# Altium PCB GPIOmodule.PcbDoc
Units mm, origin at the board's own origin, x right, y up, seen from the top; angles counter-clockwise.
Board outline 30.01 x 20.01 mm, 2 copper layers (Top Layer, Bottom Layer), stack 1.58 mm thick; 2 components, 3 nets, 13 pads, 5 vias.
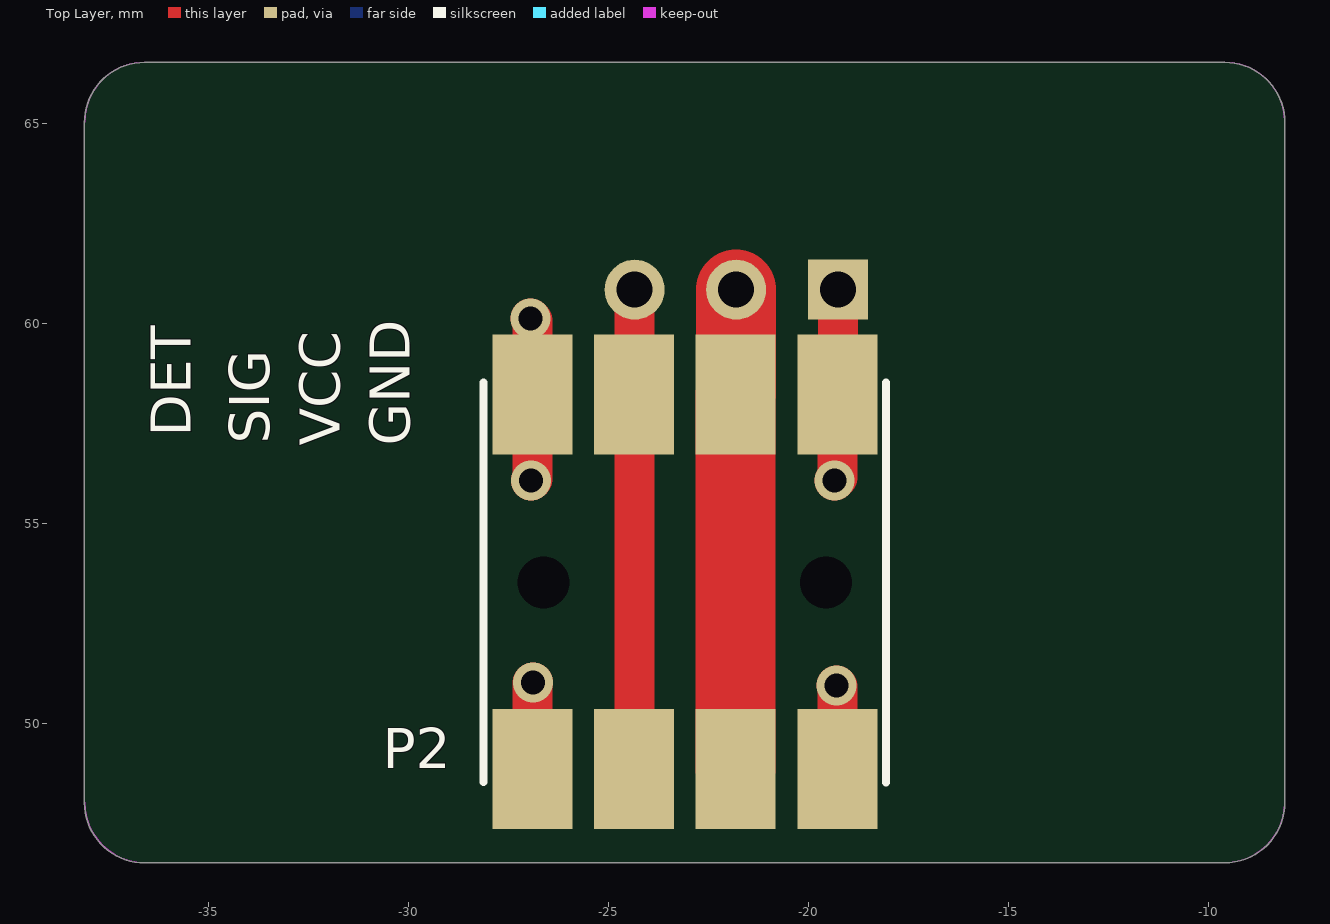
[diagram p0: Top Layer view]
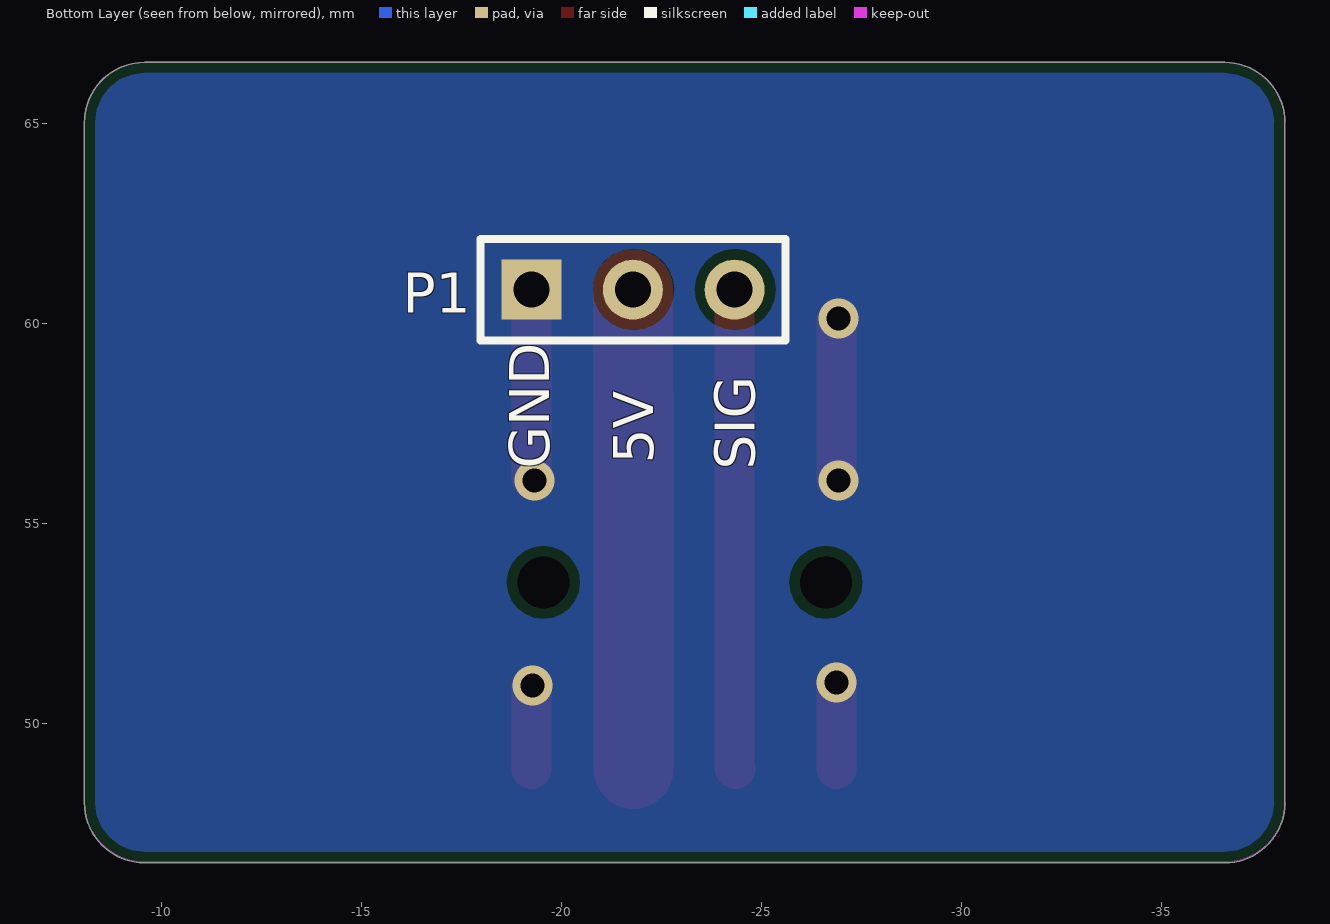
[diagram p1: Bottom Layer view, seen from below]

## Layer stack, top to bottom
Top Solder: solder mask 0.0102, Solder Resist, Dk 3.5
Top Layer: signal copper 0.0356
Dielectric 1: dielectric 1.5086, FR-4, Dk 4.8
Bottom Layer: signal copper 0.0356
Bottom Solder: solder mask 0.0102, Solder Resist, Dk 3.5

## Board outline
-36.586,46.515 cw(c-36.586,48.022) -38.092,48.022 -38.092,65.022 cw(c-36.586,65.022) -36.586,66.529 cw(c-36.586,66.522) -36.586,66.529 cw(c-36.586,66.522) -36.586,66.529 -9.586,66.529 ccw(c-9.586,66.522) -9.586,66.529 ccw(c-9.586,66.522) -9.586,66.529 cw(c-9.586,65.022) -8.079,65.022 -8.079,48.022 cw(c-9.586,48.022) -9.586,46.515 cw(c-9.586,46.522) -9.586,46.515

## Design rules (kind name [scope] priority, off if disabled: settings)
Clearance Clearance_1 [InNet('GND')] p1: gap=0.254
Clearance cutout [IsRegion] p2: gap=0.2
Clearance keepout [OnLayer('Keep-Out Layer')] p3: gap=0.2
Clearance [All] p4: gap=0.254
HoleSize [All] p1: absolutevalues=TRUE maxlimit=5 minlimit=0.01 maxpercent=80.000 minpercent=20.000
MinimumSolderMaskSliver [All] p1: minsoldermaskwidth=0.01
PolygonConnect [All] p1: connectstyle=Direct reliefconductorwidth=0.254 reliefentries=4 polygonreliefangle="90 Angle" airgapwidth=0.254
RoutingVias [All] p1: holewidth=0.3 width=0.6 viastyle="Through Hole" minholewidth=0.3 minwidth=0.6 maxholewidth=5 maxwidth=5
SilkToSilkClearance [All] p1: silktosilkclearance=0.1
SilkToSolderMaskClearance [IsPad] p1: minsilkscreentomaskgap=0.01 clearancetoexposedcopper=TRUE
SolderMaskExpansion [All] p1: expansion=0.102
Width [All] p1: maxlimit=5 minlimit=0.254 preferedwidth=0.254
26 further rules are at their usual default settings.

## Components (designator, comment, footprint, x,y, rotation, side; value= is the part's Value field where it differs from the comment)
P1 "Header 3" HDR1X3 -19.255,60.844 r180 bottom
P2 "Header 4" CONfLAT 1218.001,1303.327 r0 top

## Footprints (in the part's own frame and the unit in brackets; to place one, negate y for a bottom-side part, rotate by r counter-clockwise, add the part's x,y. Pads: shape width x height; smd on the part's side, far side on the other; paste and mask are expansions set on the pad)
CONfLAT [mm]
  rect 2x3 smd paste+0: 1(-1244.887,-1254.464) 1(-1244.887,-1245.105) 2(-1242.354,-1254.464) 2(-1242.354,-1245.105) 3(-1239.812,-1254.464) 3(-1239.812,-1245.105) 4(-1237.263,-1254.464) 4(-1237.263,-1245.105)
  round 0 hole 1.3 paste+0: NC(-1244.616,-1249.798) NC(-1237.556,-1249.798)
  silkscreen extent -1246.12,-1254.8 -1236.06,-1244.8, body extent -1246.15,-1254.8 -1236.09,-1244.8, height 1.08
HDR1X3 [mm] "Connector; Header; 3 Position"
  rect 1.5x1.5 hole 0.9: 1(0,0)
  round 1.5 hole 0.9: 2(2.54,0) 3(5.08,0)
  silkscreen extent -1.27,-1.27 6.35,1.27

## Part data
P1: "Header, 3-Pin"
P2: "Header, 4-Pin"

## Via types
v1: diameter 1, hole 0.6, Top Layer to Bottom Layer, tented both sides, 5 vias

## Nets (pads, with @x,y where several pads share a name; then routed paths per layer and width w, separated by ;. In a path a pad name is that pad's centre, name@x,y a point inside that pad or via, vN(x,y) a via of type N, cw(c..) or ccw(c..) an arc to the next point about the centre after c; other vN are vias at no path point)
5V: P1.2 P2.3 | length 12
  Top Layer w2: P2.3@-21.811,48.863 -21.811,58.222 -21.795,58.238 P1.2
GND: P1.1 P2.1 P2.4 | length 13.7
  Top Layer w1: v1(-26.935,60.122) -26.886,60.073 -26.886,58.222 -26.886,56.111 v1(-26.928,56.069) ; P2.1@-26.886,48.863 -26.886,51.014 v1(-26.878,51.022) ; v1(-19.334,56.078) -19.262,56.15 P2.4@-19.262,57.687 ; v1(-19.288,50.945) -19.262,50.919 P2.4@-19.262,48.863 ; P2.4@-19.262,58.222 P2.4@-19.262,57.687 ; P1.1 -19.255,57.694 P2.4@-19.262,57.687
SERVO_C: P1.3 P2.2 | length 12
  Top Layer w1: P2.2@-24.353,48.863 -24.335,48.881 P1.3 ; P2.2@-24.353,58.222 P2.2@-24.35,58.224
pads on no net: P2.NC

## Polygon pours and split planes (outlines as drawn)
GND on Bottom Layer "Bottom Layer-No Net" (solid, pour order 9): -38.081,47.875 -37.656,46.952 -36.74,46.533 -35.467,46.533 -9.561,46.533 -8.515,46.952 -8.072,48.022 -8.072,65.022 -8.515,66.093 -9.586,66.536 -36.66,66.536 -37.75,65.978 -38.084,65.112

## Keep-outs
Keep-Out Layer:
  lines w0.013: -38.085,48.029 ccw(c-36.585,48.029) -36.585,46.529 -9.585,46.529 ccw(c-9.585,48.029) -8.085,48.029 -8.085,65.029 ccw(c-9.585,65.029) -9.585,66.529 -36.585,66.529 ccw(c-36.585,65.029) -38.085,65.029 -38.085,48.029

## Silkscreen, mask and mechanical layers (free items; w line width, h text height)
Top Overlay:
  text "DET" at -35.427,57.167 h1 r90
  text "SIG" at -33.467,56.989 h1 r90
  text "VCC" at -31.71,56.938 h1 r90
  text "GND" at -29.953,56.938 h1 r90
Bottom Overlay:
  text "5V" at -22.299,56.497 h1 r270
  text "SIG" at -24.836,56.346 h1 r270
  text "GND" at -19.707,56.367 h1 r270
Mechanical 3:
  circle w0.013: c-26.615,53.529 r0.6
  circle w0.013: c-19.555,53.529 r0.6
  circle w0.013: c-25.625,60.849 r0.5
  circle w0.013: c-20.545,60.849 r0.5
  circle w0.013: c-23.085,60.849 r0.5
  lines w0.013: -28.115,48.529 -28.115,58.529 -18.055,58.529 -18.055,48.529 -28.115,48.529 ; -27.87,47.894 -25.92,47.894 -25.92,50.304 -27.87,50.304 -27.87,47.894 ; -27.87,56.754 -25.92,56.754 -25.92,59.164 -27.87,59.164 -27.87,56.754 ; -25.33,47.894 -23.38,47.894 -23.38,50.304 -25.33,50.304 -25.33,47.894 ; -25.33,56.754 -23.38,56.754 -23.38,59.164 -25.33,59.164 -25.33,56.754 ; -22.79,47.894 -20.84,47.894 -20.84,50.304 -22.79,50.304 -22.79,47.894 ; -22.79,56.754 -20.84,56.754 -20.84,59.164 -22.79,59.164 -22.79,56.754 ; -20.25,47.894 -18.3,47.894 -18.3,50.304 -20.25,50.304 -20.25,47.894 ; -20.25,56.754 -18.3,56.754 -18.3,59.164 -20.25,59.164 -20.25,56.754
Mechanical 5:
  circle w0.013: c-26.616,53.522 r0.6
  circle w0.013: c-19.556,53.522 r0.6
  circle w0.013: c-25.626,60.842 r0.5
  circle w0.013: c-20.546,60.842 r0.5
  circle w0.013: c-23.086,60.842 r0.5
  circle w0.013: c-19.556,53.522 r0.6
  circle w0.013: c-26.616,53.522 r0.6
  circle w0.013: c-25.626,60.842 r0.5
  circle w0.013: c-23.086,60.842 r0.5
  circle w0.013: c-20.546,60.842 r0.5
  lines w0.013: -38.086,48.022 ccw(c-36.586,48.022) -36.586,46.522 ; -38.086,48.022 ccw(c-36.586,48.022) -36.586,46.522 ; -38.086,48.022 -38.086,65.022 ; -38.086,48.022 -38.086,65.022 ; -38.086,65.022 cw(c-36.586,65.022) -36.586,66.522 ; -38.086,65.022 cw(c-36.586,65.022) -36.586,66.522 ; -36.586,46.522 -9.586,46.522 ; -36.586,46.522 -9.586,46.522 ; -36.586,66.522 -9.586,66.522 ; -36.586,66.522 -9.586,66.522 ; -9.586,46.522 ccw(c-9.586,48.022) -8.086,48.022 ; -9.586,46.522 ccw(c-9.586,48.022) -8.086,48.022 ; -9.586,66.522 cw(c-9.586,65.022) -8.086,65.022 ; -9.586,66.522 cw(c-9.586,65.022) -8.086,65.022 ; -8.086,48.022 -8.086,65.022 ; -8.086,48.022 -8.086,65.022 ; -38.086,50.522 -35.086,50.522 -35.086,62.522 -38.086,62.522 -38.086,50.522 ; -28.116,48.522 -28.116,58.522 -27.721,58.522 -26.071,58.522 -25.181,58.522 -23.531,58.522 -22.641,58.522 -20.991,58.522 -20.101,58.522 -18.451,58.522 -18.056,58.522 -18.056,48.522 -18.451,48.522 -20.101,48.522 -20.991,48.522 -22.641,48.522 -23.531,48.522 -25.181,48.522 -26.071,48.522 -27.721,48.522 -28.116,48.522 ; -26.896,59.572 -26.896,62.112 -19.276,62.112 -19.276,59.572 -26.896,59.572 ; -11.086,50.522 -8.086,50.522 -8.086,62.522 -11.086,62.522 -11.086,50.522